# Altium PCB HornetPCB.PcbDoc (part 2 of 2)
Units mil, origin at the board's own origin, x right, y up, seen from the top; angles counter-clockwise.
Board outline 2280 x 3500 mil, 4 copper layers (Top Layer, Ground, Power, Bottom Layer), stack 23.756 mil thick; 76 components, 42 nets, 264 pads, 76 vias.
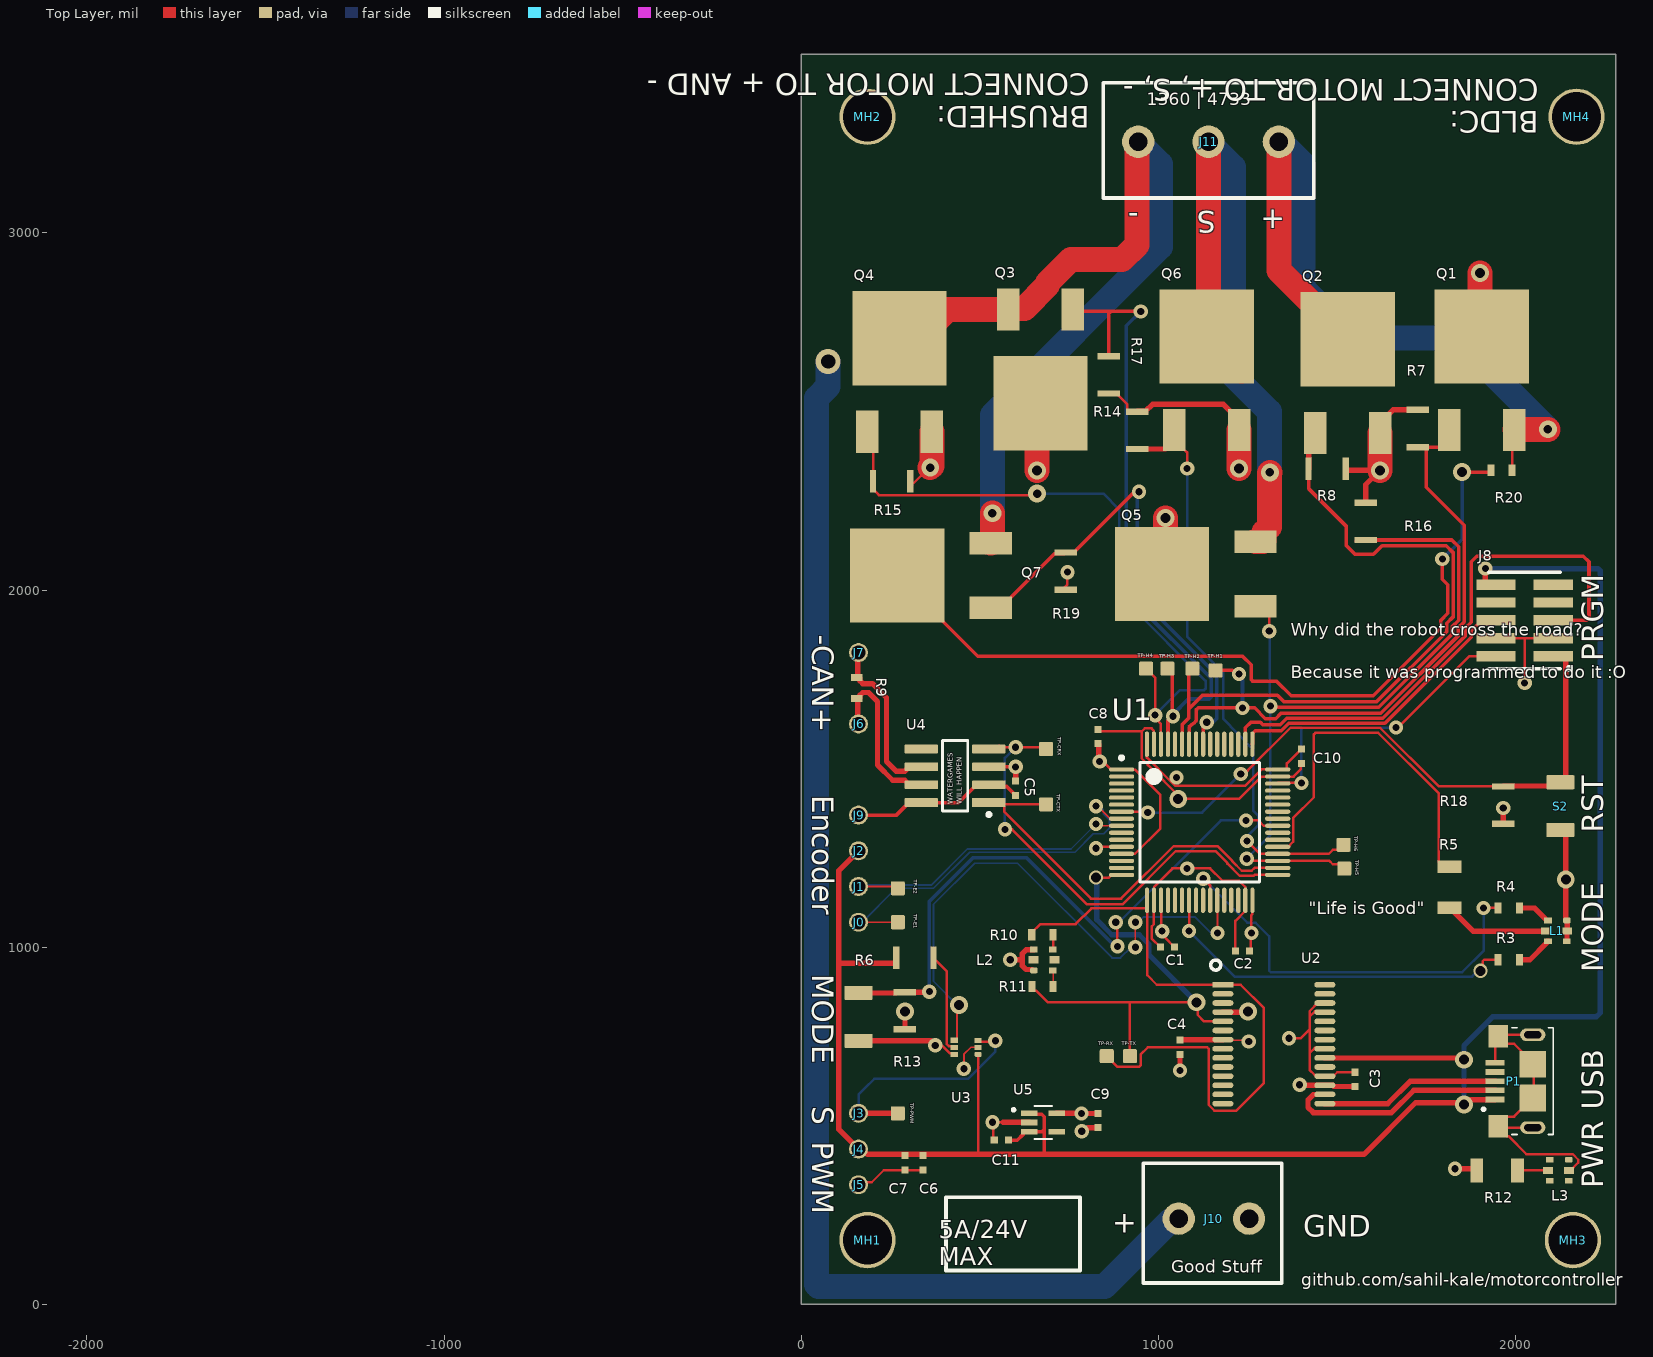
[diagram p0: Top Layer view]

## Via types
v1: diameter 40, hole 20, Top Layer to Bottom Layer, 54 vias
v2: diameter 50, hole 28, Top Layer to Bottom Layer, 14 vias
v3: diameter 50, hole 23.62, Top Layer to Bottom Layer, 5 vias
v4: diameter 40, hole 28, Top Layer to Bottom Layer, 2 vias
v5: diameter 70, hole 40, Top Layer to Bottom Layer, 1 vias

## Nets (pads, with @x,y where several pads share a name; then routed paths per layer and width w, separated by ;. In a path a pad name is that pad's centre, name@x,y a point inside that pad or via, vN(x,y) a via of type N, cw(c..) or ccw(c..) an arc to the next point about the centre after c; other vN are vias at no path point) (continued)
NetL1_6: (continued)
  Top Layer w15: R3.1@2014.06,965 2039.49,965 2087.62,1013.13 2087.62,1016.08 2087.99,1016.46 L1.6@2090.94,1016.46
NetL2_2: L2.2 R11.1 | length 45.4
  Top Layer w5: L2.2 705,934.06 R11.1
NetL2_6: L2.6 R10.1 | length 45.2
  Top Layer w7: R10.1@705,1039.06 705.26,1038.8 705.26,994.31 L2.6@705.51,994.06
NetL3_4: L3.4 R12.1 | length 85
  Top Layer w7: R12.1 L3.4
NetMODE_2: MODE.2 R13.2 U1.40 | length 1742.8
  Top Layer w7: v1(880,1070) 885,1065 v1(885,1002.5) ; v1(1245,1355) 1279.25,1355 1294.1,1340.16 1296.94,1340.16
  Top Layer w15: MODE.2 264.96,871.93 267.36,874.33 R13.2 356.99,874.33 v1(358.27,875.61)
  Bottom Layer w7: v1(880,1070) 889.27,1070 1174.27,1355 v1(1245,1355)
  Bottom Layer w10: v1(358.27,875.61) 358.27,1128.27 480,1250 630.7,1250 878.2,1002.5 v1(885,1002.5)
NetQ1_1: Q1.1 R7.2 TP-H1.1 U1.58 | length 1791.4
  Top Layer w10: 1085.47,1605.07 1085.47,1616.33 1091.33,1622.19 1101.06,1629.59 1105,1633.53 1105,1664.14 1110.86,1670 1216.88,1670 1221.14,1674.26 1230.74,1674.26 v1(1235,1670) 1239.26,1674.26 1248.86,1674.26 1253.12,1670 1268.9,1670 1298.9,1640 1327.9,1640 1342.9,1655 1622.16,1655 1838.5,1871.34 1838.5,1893.7 1855.5,1910.7 1855.5,2180.97 1749,2287.47 1749,2398.64 R7.2@1747.64,2400 ; TP-H1.1 1206.88,1775 1216.88,1765 v1(1225,1765) ; R7.2 R7.2@1747.64,2400 ; Q1.1 1814.45,2424 1790.45,2400 R7.2@1747.64,2400
  Bottom Layer w10: v1(1225,1765) 1225,1756.88 1235,1746.88 v1(1235,1670)
NetQ2_1: Q2.1 R8.2 TP-H2.1 U1.59 | length 1970.1
  Top Layer w10: U1.59 1065.79,1622.53 1084.8,1641.54 1084.8,1666.76 ; TP-H2.1 1084.8,1769.8 1084.8,1666.76 ; R8.2 1420,2284.47 1525,2179.47 1525,2125 1550,2100 1601.57,2100 1625.78,2124.22 1805.28,2124.22 1824.5,2105 1824.5,1924.5 1806.66,1906.66 1806.66,1883.34 1610.25,1686.93 1350.97,1686.93 1332.9,1705 1123.04,1705 1084.8,1666.76
  Top Layer w15: R8.2 1420,2396.18 1444.45,2420.63 Q2.1@1444.45,2434.41
NetQ3_1: Q3.1 R14.2 TP-H3.1 U1.61 | length 1872.4
  Top Layer w10: Q3.1 765,2780 865.86,2780 ; R14.2 860,2774.14 865.86,2780 ; v1(950,2780) 865.86,2780 ; TP-H3.1 1038.01,1766.99 1038.01,1648.76 v1(1040.26,1646.5) 1026.42,1635.87 U1.61
  Bottom Layer w10: v1(950,2780) 910,2740 910,2040 930,2020 930,1969.43 1148,1751.43 1148,1700.86 1142.14,1695 1083.52,1695 1040.26,1651.74 v1(1040.26,1646.5)
NetQ4_1: Q4.1 R15.2 TP-H4.1 U1.62 | length 1876
  Top Layer w7: Q4.1 200.67,2426.97 R15.2 200.67,2282.36 217.03,2266 656,2266 v3(660,2270) ; TP-H4.1@965.67,1780.67 TP-H4.1 990.37,1754.63 v1(990.37,1649.84) ; v1@992.04,1639.24 1006.73,1624.55 U1.62
  Bottom Layer w7: v3(660,2270) 845.4,2270 889.5,2225.9 889.5,2038.58 899.04,2029.04 914.5,2013.58 914.5,1963.01 1131.6,1745.91 1131.6,1724.1 1127.5,1720 1059.77,1720 990.37,1650.6 v1(990.37,1649.84)
NetQ5_1: Q5.1 R16.2 TP-H5.1 U1.35 | length 2185
  Top Layer w7: v1(1246.8,1247.6) 1251.74,1242.65 1332.58,1242.65 U1.35 1478.27,1241.73 1487.75,1232.25 1507.75,1232.25 TP-H5.1 ; Q5.1 1282,1954.45 1310,1926.45 v1(1310,1885)
  Top Layer w10: v1(1313.4,1675) 1316.97,1671.43 1616.67,1671.43 1823,1877.76 1823,1898 1840,1915 1840,2120.9 1820.9,2140 1557.36,2140 R16.2@1553.5,2136.14
  Bottom Layer w7: v1(1246.8,1247.6) 1313.4,1314.2 v1(1313.4,1675) 1311.7,1676.7 1311.7,1883.3 v1(1310,1885)
NetQ6_1: Q6.1 R17.2 TP-H6.1 U1.36 | length 1671.4
  Top Layer w7: Q6.1 1044.45,2420.63 1080,2385.08 v1(1080,2340) ; v1(1247.53,1297.59) 1283.71,1261.42 U1.36 1476.42,1261.42 1488.02,1273.02 1504.44,1273.02 TP-H6.1
  Top Layer w15: R17.2 1018.82,2395 Q6.1@1044.45,2420.63
  Bottom Layer w7: v1(1080,2340) 1080,1870 1180.5,1769.5 1180.5,1760 1180.5,1639.86 1265,1553.79 1265,1382.38 1278.5,1368.88 1278.5,1341.12 1247.28,1309.9 1247.28,1297.85 v1(1247.53,1297.59)
NetQ7_1: Q7.1 R19.2 U1.56 | length 1376.2
  Top Layer w10: Q7.1 557.56,1950 708.7,2101.14 736.14,2101.14 R19.2 762.64,2105 926.9,2269.26 939.26,2269.26 v1(945,2275) ; U1.56 1125.19,1568.85 1125.19,1620.19 v1(1135,1630)
  Bottom Layer w10: v1(945,2275) 940,2270 940,2052.38 955,2037.38 955,1970 1162.48,1762.52 1162.48,1640 1152.48,1630 v1(1135,1630)
NetQ7_2: Q7.2 R20.1 | length 2321.6
  Top Layer w10: Q7.2 493.74,1815 1235,1815 1259.11,1790.89 1259.11,1749.38 1264.38,1744.11 1330.89,1744.11 1371.07,1703.93 1600.71,1703.93 1789.66,1892.88 1789.66,1914.66 1810,1935 1810,2015 1794.5,2030.5 v1(1794.5,2086.99) ; v2(1850,2330) 1926.1,2330 1930.94,2334.84 R20.1
  Bottom Layer w10: v1(1794.5,2086.99) 1850,2142.49 v2(1850,2330)
NetR3_2: R3.2 U1.23 | length 1035.9
  Top Layer w7: v1(1085.47,1045.47) U1.23 ; v4(1901.19,933.81) 1907.5,940.13 1907.5,960.87 1911.64,965 R3.2
  Bottom Layer w7: v1(1085.47,1045.47) 1212.94,918 1877.87,918 1893.68,933.81 v4(1901.19,933.81)
NetR4_2: R4.2 U1.26 | length 1207.7
  Top Layer w7: v1(1125.03,1191.93) 1132.65,1184.98 1144.25,1173.38 1144.25,1131.78 U1.26 ; v1(1910,1110) 1942.91,1110 1946.93,1105.98 R4.2
  Bottom Layer w7: v1(1125.03,1191.93) 1248.46,1068.5 1271.81,1068.5 1310,1030.3 1310,934.1 1314.1,930 1850,930 1910,990 v1(1910,1110)
NetR5_2: R5.2 U1.37 | length 1022.5
  Top Layer w7: U1.37 1362.3,1281.1 1376.44,1295.23 1376.44,1361.44 1435,1420 1435,1595.9 1439.1,1600 1615,1600 1785.04,1429.96 1785.04,1239.22 1799.25,1225 R5.2
NetR6_1: R6.1 U3.5 | length 281.3
  Top Layer w7: R6.1 407.64,932.36 407.64,728.28 412.84,723.07 424.68,723.07 U3.5
NetR10_2: R10.2 TP-RX.1 U1.17 U2.1 | length 1853.1
  Top Layer w7: R10.2 645,1040.91 669.09,1065 768,1065 812,1109 965.14,1109 967.36,1111.22 U1.17 968.5,1130.36 968.5,921.5 995,895 U2.1 1230,895 1295,830 1295,620 1217.9,542.9 1156.03,542.9 1140,558.93 1140,715.9 1135.9,720 970,720 950,700 950,669.1 945.9,665 885,665 TP-RX.1
NetR11_2: R11.2 TP-TX.1 U1.16 U2.5 | length 1321.9
  Top Layer w7: R11.2 645.94,884.09 652.29,877.75 658.19,877.75 690.57,845.37 920,845.37 ; v4@835,1195 860.91,1195 868.27,1202.36 U1.16 ; TP-TX.1 920,845.37 ; U2.5 1127.36,792.64 1109.63,810.37 1109.63,842.11 1106.37,845.37 920,845.37
  Bottom Layer w15: v4(825,1195) 827,1193 827,1077.04 869.04,1035 945.96,1035 972.5,1008.46 972.5,979.24 v2(1105.87,845.87)
NetTP-CRX_1: TP-CRX.1 U1.33 U4.4 | length 1352.3
  Top Layer w7: U4.4 544.9,1555 553.71,1563.8 557.51,1560 v1(600,1560) 680,1560 TP-CRX.1 ; v1(570,1330) 590,1330 800,1120 898.9,1120 1048.26,1269.36 1158.88,1269.36 1193,1235.24 1193,1234.22 1227.12,1200.1 1266.47,1200.1 1268.74,1202.36 U1.33
  Bottom Layer w7: v1(570,1330) 570,1530 v1(600,1560)
NetTP-CTX_1: TP-CTX.1 U1.34 U4.1 | length 1144
  Top Layer w7: U4.1 530,1400 U4.1@564.45,1400 ; TP-CTX.1 U4.1@564.45,1400 ; U1.34 1268.62,1222.05 1260.67,1214.1 1232.92,1214.1 1207,1240.02 1207,1241.04 1164.68,1283.36 1042.46,1283.36 895.35,1136.26 810.88,1136.26 568.25,1378.88 568.25,1396.2 U4.1@564.45,1400
NetU1_27: U1.27 U3.4 | length 1570.9
  Top Layer w5: U3.4 430.53,739.37 435.41,744.25 435.41,832.39 v2(441.14,838.11) ; v1(935,1000) v1(935,1070) ; U1.27 1165,1130.71 v1(1165,1040)
  Bottom Layer w5: v2(441.14,838.11) 436.89,838.11 370,905 370,1120 485,1235 605,1235 870,970 893.26,970 923.26,1000 v1(935,1000) ; v1(935,1070) 943.07,1070 958.05,1084.98 1100.98,1084.98 1145.96,1040 v1(1165,1040)
POWER+: J10.1 Q1.2 Q3.2 Q5.2 | length 4199.6
  Top Layer w70: v2(660,2335) 660,2470.71 669.45,2480.16 Q3.2 ; Q5.2 1019.13,2054.13 v2(1019.13,2201.9) ; v2(1899.45,2888) 1899.45,2715.55 Q1.2
  Bottom Layer w70: v5(75,2640) 75,2570 42.87,2537.87 42.87,55.51 47.87,50.52 848.67,50.52 J10.1@1033.15,235
USB_N: P1.2 U2.16 | length 630.5
  Top Layer w15: U2.16 1465.29,587.77 1433.34,587.77 1418.41,572.83 1418.41,551.81 1433.27,536.95 1651.98,536.95 1714.73,599.7 1908.44,599.7 1908.52,599.63 1942.13,599.63 P1.2
USB_P: P1.3 U2.15 | length 503.2
  Top Layer w15: U2.15 1487.29,562.32 1487.66,561.95 1641.62,561.95 1704.38,624.7 1908.44,624.7 1908.52,624.78 1942.13,624.78 P1.3
pads on no net: J8.7 J8.8 J8.9 L2.3 L2.4 L3.1 L3.2 L3.5 L3.6 MH1.3 MH2.3 MH3.3 MH4.3 P1.4 U1.2 U1.3 U1.4 U1.5 U1.6 U1.10 U1.11 U1.14 U1.15 U1.20 U1.21 U1.22 U1.24 U1.25 U1.28 U1.29 U1.30 U1.38 U1.39 U1.41 U1.42 U1.43 U1.44 U1.45 U1.51 U1.52 U1.53 U1.54 U1.55 U1.57 U1.60 U2.2 U2.3 U2.6 U2.8 U2.9 U2.10 U2.11 U2.12 U2.13 U2.14 U2.19 U2.22 U2.23 U2.24 U2.27 U2.28 U4.5 U5.4

## Polygon pours and split planes (outlines as drawn)
GND on Ground (split plane): 2259.9,20.1 20.1,20.1 20.1,3479.9 2259.9,3479.9
3V3 on Power (split plane): 2259.9,20.1 20.1,20.1 20.1,2414.02 20.29,2413.05 21.4,2411.4 23.05,2410.29 25,2409.9 477.89,2409.9 539.9,2347.89 539.9,2190 540.29,2188.05 541.4,2186.4 604.9,2122.89 604.9,1740 605.29,1738.05 606.4,1736.4 621.4,1721.4 623.05,1720.29 625,1719.9 1545,1719.9 1546.95,1720.29 1548.6,1721.4 1558.6,1731.4 1559.71,1733.05 1560.1,1735 1560.1,1832.89 2168.6,2441.4 2169.71,2443.05 2170.1,2445 2170.1,3035 2169.71,3036.95 2168.6,3038.6 2143.6,3063.6 2141.95,3064.71 2140,3065.1 30,3065.1 28.05,3064.71 26.4,3063.6 25.29,3061.95 24.9,3060 24.9,2422.11 21.4,2418.6 20.29,2416.95 20.1,2415.98 20.1,3479.9 2259.9,3479.9
POWER+ on Power (split plane): 2159.9,3032.89 2159.9,2447.11 1551.4,1838.6 1550.29,1836.95 1549.9,1835 1549.9,1737.11 1542.89,1730.1 627.11,1730.1 615.1,1742.11 615.1,2125 614.71,2126.95 613.6,2128.6 550.1,2192.11 550.1,2350 549.71,2351.95 548.6,2353.6 483.6,2418.6 481.95,2419.71 480,2420.1 35.1,2420.1 35.1,3054.9 2137.89,3054.9

## Other copper
Top Layer:
  region: -2030,375
  region: -2030,375
  region: -2030,375
  region: -2030,375
  region: -2030,375
  region: -2030,375
  region: -2030,375
  region: -2030,375
  region: -2030,375
  region: -2030,375
  region: -2030,375
  region: -2030,375
  region: -2030,375
  region: -2030,375
  region: -2030,375
  region: -2030,375
  region: -2030,375
  region: -2030,375
  region: -2030,375
  region: -2030,375
  region: -2030,375
  region: -2030,375
  region: -2030,375
  region: -2030,375
  region: -2030,375
  region: -2030,375
  region: -2030,375
  region: -1550,305
  region: -1550,305
  region: -1550,305
  region: -1550,305
  region: -1550,305
  region: -1550,305
  region: -1550,305
  region: -1550,305
  region: -1550,305
  region: -1550,305
  region: -1550,305
  region: -1550,305
  region: -1550,305
  region: -1550,305
  region: -1550,305
  region: -1550,305
  region: -1550,305
  region: -1550,305
  region: -1550,305
  region: -1550,305
  region: -1550,305
  region: -1550,305
  region: -1550,305
  region: -1550,305
  region: -1550,305
  region: -1550,305
  region: -1550,305
Power (plane layer: these items are gaps in the copper):
  lines w10: 25,2415 30,2420 30,3060 2140,3060 2165,3035 2165,2445 1555,1835 1555,1735 1545,1725 625,1725 610,1740 610,2125 545,2190 545,2350 480,2415 25,2415

## Silkscreen, mask and mechanical layers (free items; w line width, h text height)
Top Overlay:
  lines w10: 405,95 405,115 405,300 780,300 780,95 405,95
  text "BRUSHED: / CONNECT MOTOR TO + AND -" at 807.44,3445 h60 r180
  text "BLDC: / CONNECT MOTOR TO +, S, -" at 2064.91,3430 h60 r180
  text "1360 | 4733" at 967.24,3345 h60
  text "-" at 945,3074.99 h60 r180
  text "+" at 1355,3065 h60 r180
  text "S" at 1160,3060 h60 r180
  text "-CAN+" at 30,1874.95 h60 r270
  text "PRGM" at 2245,1800 h60 r90
  text "Why did the robot cross the road? /  / Because it was programmed to do it :O" at 1370,1740 h60
  text "Encoder" at 30,1425 h60 r270
  text "WATERGAMES / WILL HAPPEN" at 455,1400 h25 r90
  text "RST" at 2245,1320 h60 r90
  text "\"Life is Good\"" at 1420,1080.43 h60
  text "MODE" at 2245,930 h60 r90
  text "S" at 30,555 h60 r270
  text "USB" at 2245,545 h60 r90
  text "PWM" at 30,454.97 h60 r270
  text "PWR" at 2245,325 h60 r90
  text "+" at 870,200 h60
  text "GND" at 1405,190 h60
  text "5A/24V  / MAX" at 385.06,110 h50
  text "Good Stuff" at 1035,75.66 h60
  text "github.com/sahil-kale/motorcontroller" at 1400,40.27 h60
Bottom Overlay:
  drawing of 187 lines, arcs and shapes, not listed
  text "JLCJLCJLC" at 2013.51,3356.34 h60
  text "HORNET MOTOR CONTROLLER / S. KALE / A. CHAUDHARY / REV 1.3 /  / UWaterloo Tron '25" at 1805,2480 h60

## Text inside footprints (layer, text, board x,y; h text height)
P1: Mechanical 13 "PCB END" at 2098.84,812.01 h16 r90